# Altium PCB Main.PcbDoc
Units mil, origin at the board's own origin, x right, y up, seen from the top; angles counter-clockwise.
Board outline 900 x 895 mil, 2 copper layers (Top Layer, Bottom Layer); 3 components, 9 nets, 21 pads, 0 vias.
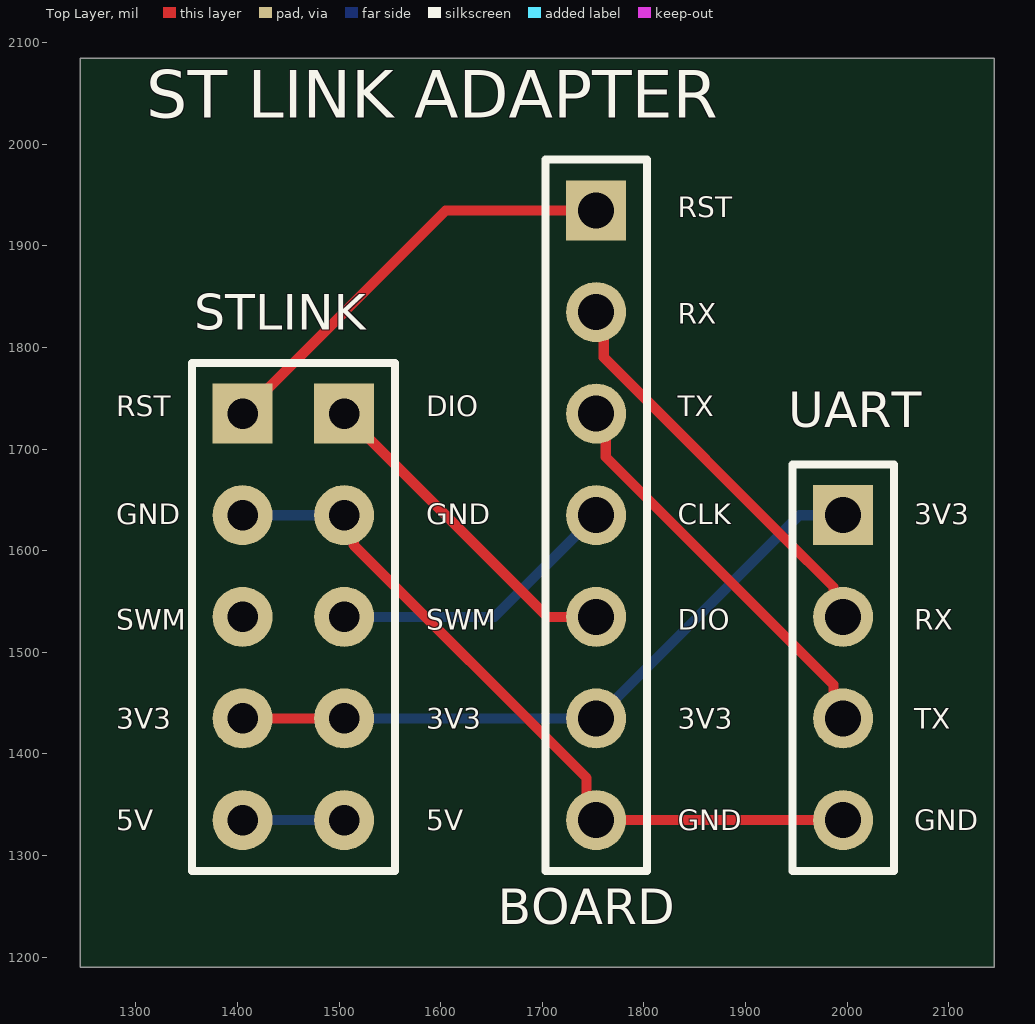
[diagram p0: Top Layer view]
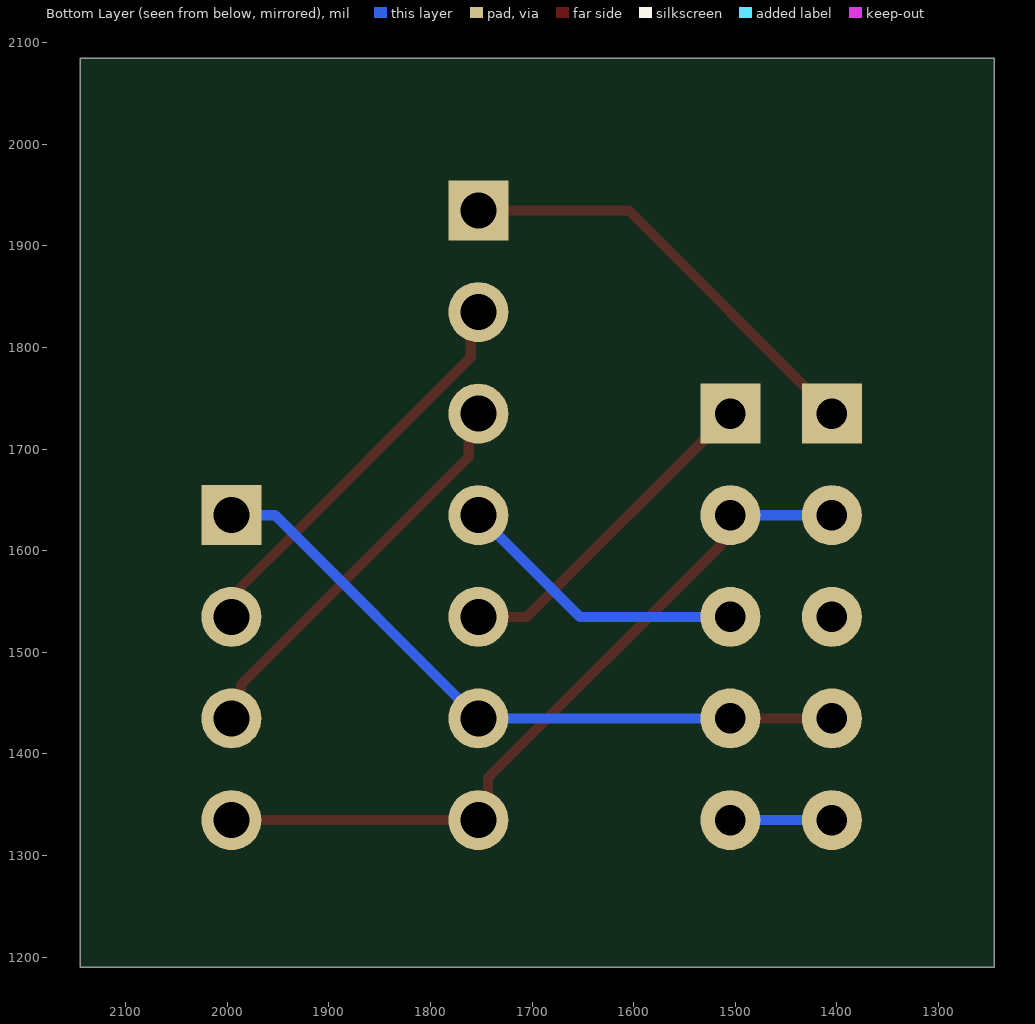
[diagram p1: Bottom Layer view, seen from below]

## Layer stack, top to bottom
Top Solder: solder mask 0.4, Solder Resist, Dk 3.5
Top Layer: signal copper 1.4
Dielectric 1: dielectric 12.6, FR-4, Dk 4.8
Bottom Layer: signal copper 1.4
Bottom Solder: solder mask 0.4, Solder Resist, Dk 3.5

## Board outline
1245,2085 1245,1190 2145,1190 2145,2085

## Design rules (kind name [scope] priority, off if disabled: settings)
Clearance [All] p1: gap=10 ignorepadtopadclearanceinfootprint=FALSE except(0: Arc-Hole Track-Hole SMDPad-Hole THPad-Hole Via-Hole Fill-Hole Poly-Hole Region-Hole Text-Hole)
PolygonConnect [All] p1: connectstyle=Relief reliefconductorwidth=10 reliefentries=4 polygonreliefangle="90 Angle" airgapwidth=10
RoutingVias [All] p1: holewidth=28 width=50 viastyle="Through Hole" minholewidth=28 minwidth=50 maxholewidth=28 maxwidth=50
SolderMaskExpansion [All] p1: expansion=4 istentingtop=FALSE
Width [All] p1: maxlimit=10 minlimit=10 preferedwidth=10
30 further rules are at their usual default settings.

## Components (designator, comment, footprint, x,y, rotation, side; value= is the part's Value field where it differs from the comment)
BOARD "Programming" HDR1X7 1753,1935 r270 top
STLINK "2x5 Header" HDR2x5 1405,1735 r270 top
UART "1x4 Header" HDR1X4 1996,1635 r270 top

## Footprints (in the part's own frame and the unit in brackets; to place one, negate y for a bottom-side part, rotate by r counter-clockwise, add the part's x,y. Pads: shape width x height; smd on the part's side, far side on the other; paste and mask are expansions set on the pad)
HDR1X4 [mm] "Connector; Header; 4 Position"
  rect 1.5x1.5 hole 0.9: 1(0,0)
  round 1.5 hole 0.9: 2(2.54,0) 3(5.08,0) 4(7.62,0)
  silkscreen extent -1.27,-1.27 8.89,1.27, body extent -1.27,-1.27 8.89,1.27, height 8.54
HDR1X7 [mm] "Connector; Header; 7 Position"
  rect 1.5x1.5 hole 0.9: 1(0,0)
  round 1.5 hole 0.9: 2(2.54,0) 3(5.08,0) 4(7.62,0) 5(10.16,0) 6(12.7,0) 7(15.24,0)
  silkscreen extent -1.27,-1.27 16.51,1.27, body extent -1.27,-1.27 16.51,1.27, height 8.54
HDR2x5 [mm]
  rect 1.5x1.5 hole 0.762: 1(0,0) 10(0,2.54)
  round 1.5 hole 0.762: 2(2.54,0) 3(5.08,0) 4(7.62,0) 5(10.16,0) 6(10.16,2.54) 7(7.62,2.54) 8(5.08,2.54) 9(2.54,2.54)
  silkscreen extent -1.27,-1.27 11.43,3.81, body extent -1.27,-1.27 11.43,3.81, height 0.25

## Part data
BOARD: library part "1x7 Header", "1x7 Pin Header"
STLINK: "2x5 Pin Header"
UART: "1x4 Pin Header"

## Nets (pads, with @x,y where several pads share a name; then routed paths per layer and width w, separated by ;. In a path a pad name is that pad's centre, name@x,y a point inside that pad or via, vN(x,y) a via of type N, cw(c..) or ccw(c..) an arc to the next point about the centre after c; other vN are vias at no path point)
3V3: BOARD.6 STLINK.4 STLINK.7 UART.1 | length 673.8
  Top Layer w10: STLINK.4@1410,1435 STLINK.7 STLINK.7@1510,1435
  Bottom Layer w10: STLINK.7 BOARD.6 1953,1635 UART.1
5V: STLINK.5 STLINK.6 | length 100
  Bottom Layer w10: STLINK.5@1410,1335 STLINK.6@1510,1335
GND: BOARD.7 STLINK.2 STLINK.9 UART.4 | length 745.7
  Top Layer w10: STLINK.9 1514.39,1625.61 1514.39,1605.61 1743.61,1376.39 1743.61,1344.39 BOARD.7 UART.4
  Bottom Layer w10: STLINK.2@1410,1635 STLINK.9 STLINK.9@1510,1635
RESET: BOARD.1 STLINK.1 | length 430.8
  Top Layer w10: STLINK.1 1605,1935 BOARD.1
RX: BOARD.2 UART.2 | length 400.6
  Top Layer w10: BOARD.2 1760.5,1827.5 1760.5,1790.47 1860.38,1690.59 ; 1860.38,1690.35 1960.26,1590.47 1960.5,1590.47 1986.61,1564.36 1986.61,1544.39 UART.2
SWCLK: BOARD.4 STLINK.8 | length 302.7
  Top Layer w10: BOARD.4@1739.73,1640 BOARD.4@1753,1640
  Bottom Layer w10: STLINK.8 1653,1535 BOARD.4
SWDIO: BOARD.5 STLINK.10 | length 344.1
  Top Layer w10: STLINK.10 1705,1535 BOARD.5
  Bottom Layer w10: BOARD.5@1743.61,1549.39 BOARD.5@1753,1540
SWIM: STLINK.3
TX: BOARD.3 UART.3 | length 400.7
  Top Layer w10: BOARD.3 1762.39,1725.61 1762.39,1692.34 1986.61,1468.11 1986.61,1444.39 UART.3

## Silkscreen, mask and mechanical layers (free items; w line width, h text height)
Top Overlay:
  text "ST LINK ADAPTER" at 1310,2010.85 h80
  text "RST" at 1833.11,1928.4 h20
  text "RX" at 1833.11,1823.4 h20
  text "RST" at 1280.61,1732.4 h20
  text "DIO" at 1585.61,1732.4 h20
  text "TX" at 1833.11,1732.4 h20
  text "GND" at 1280.61,1626 h20
  text "GND" at 1585.61,1626 h20
  text "CLK" at 1833.11,1626 h20
  text "3V3" at 2066,1626 h20
  text "SWM" at 1280.61,1522.4 h20
  text "SWM" at 1585.61,1522.4 h20
  text "DIO" at 1833.11,1522.4 h20
  text "RX" at 2066,1522.4 h20
  text "3V3" at 1280.61,1425 h20
  text "3V3" at 1585.61,1425 h20
  text "3V3" at 1833.11,1425 h20
  text "TX" at 2066,1425 h20
  text "5V" at 1280.61,1325 h20
  text "5V" at 1585.61,1325 h20
  text "GND" at 1833.11,1325 h20
  text "GND" at 2066,1325 h20